# EAGLE board proiect_v14 (EAGLE 9.7.0), part 1 of 2
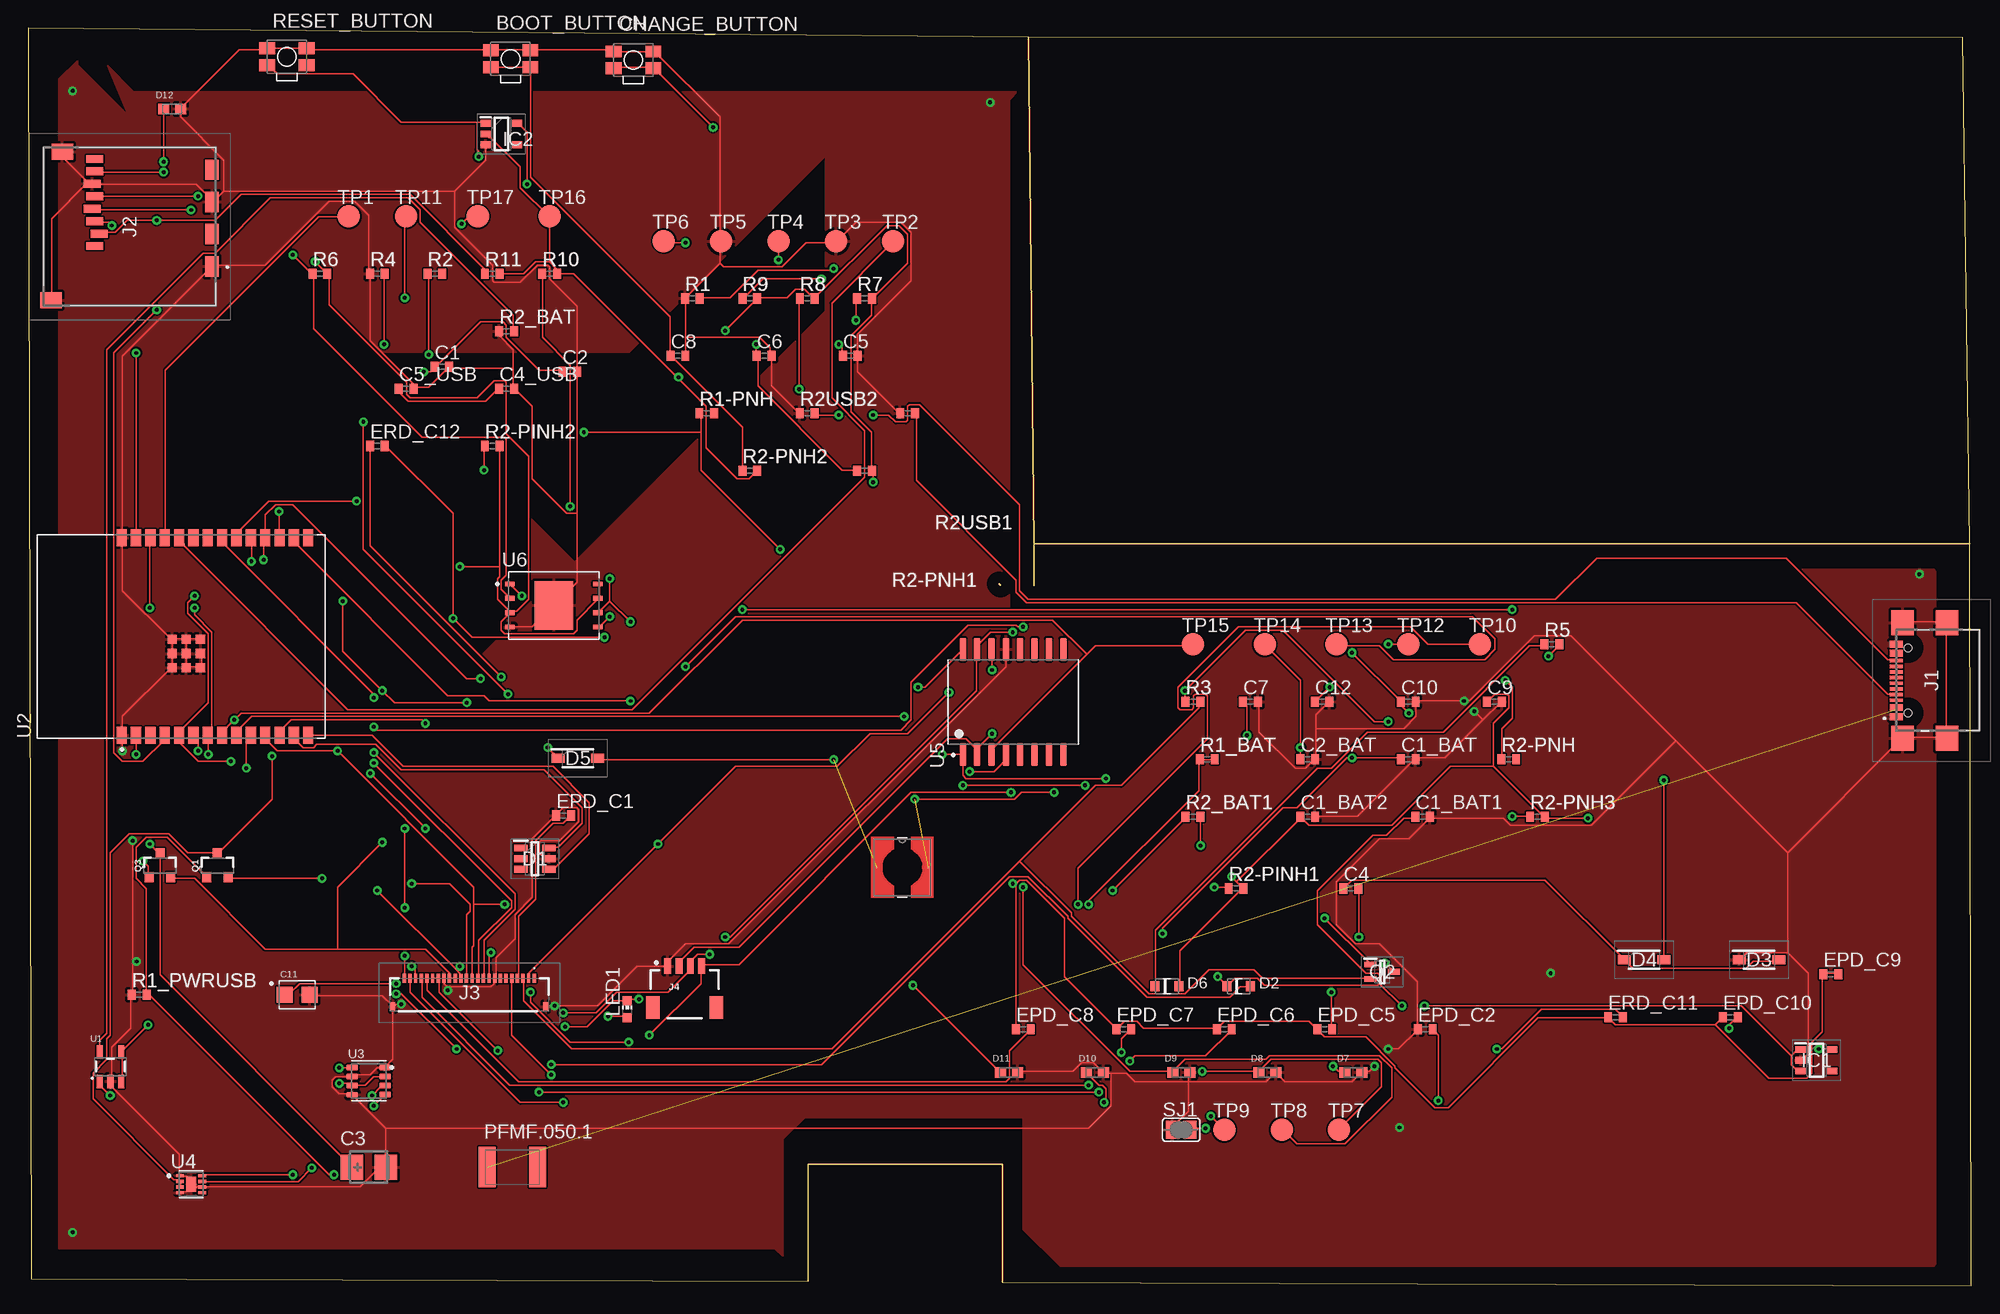
[diagram p0: board, top side]
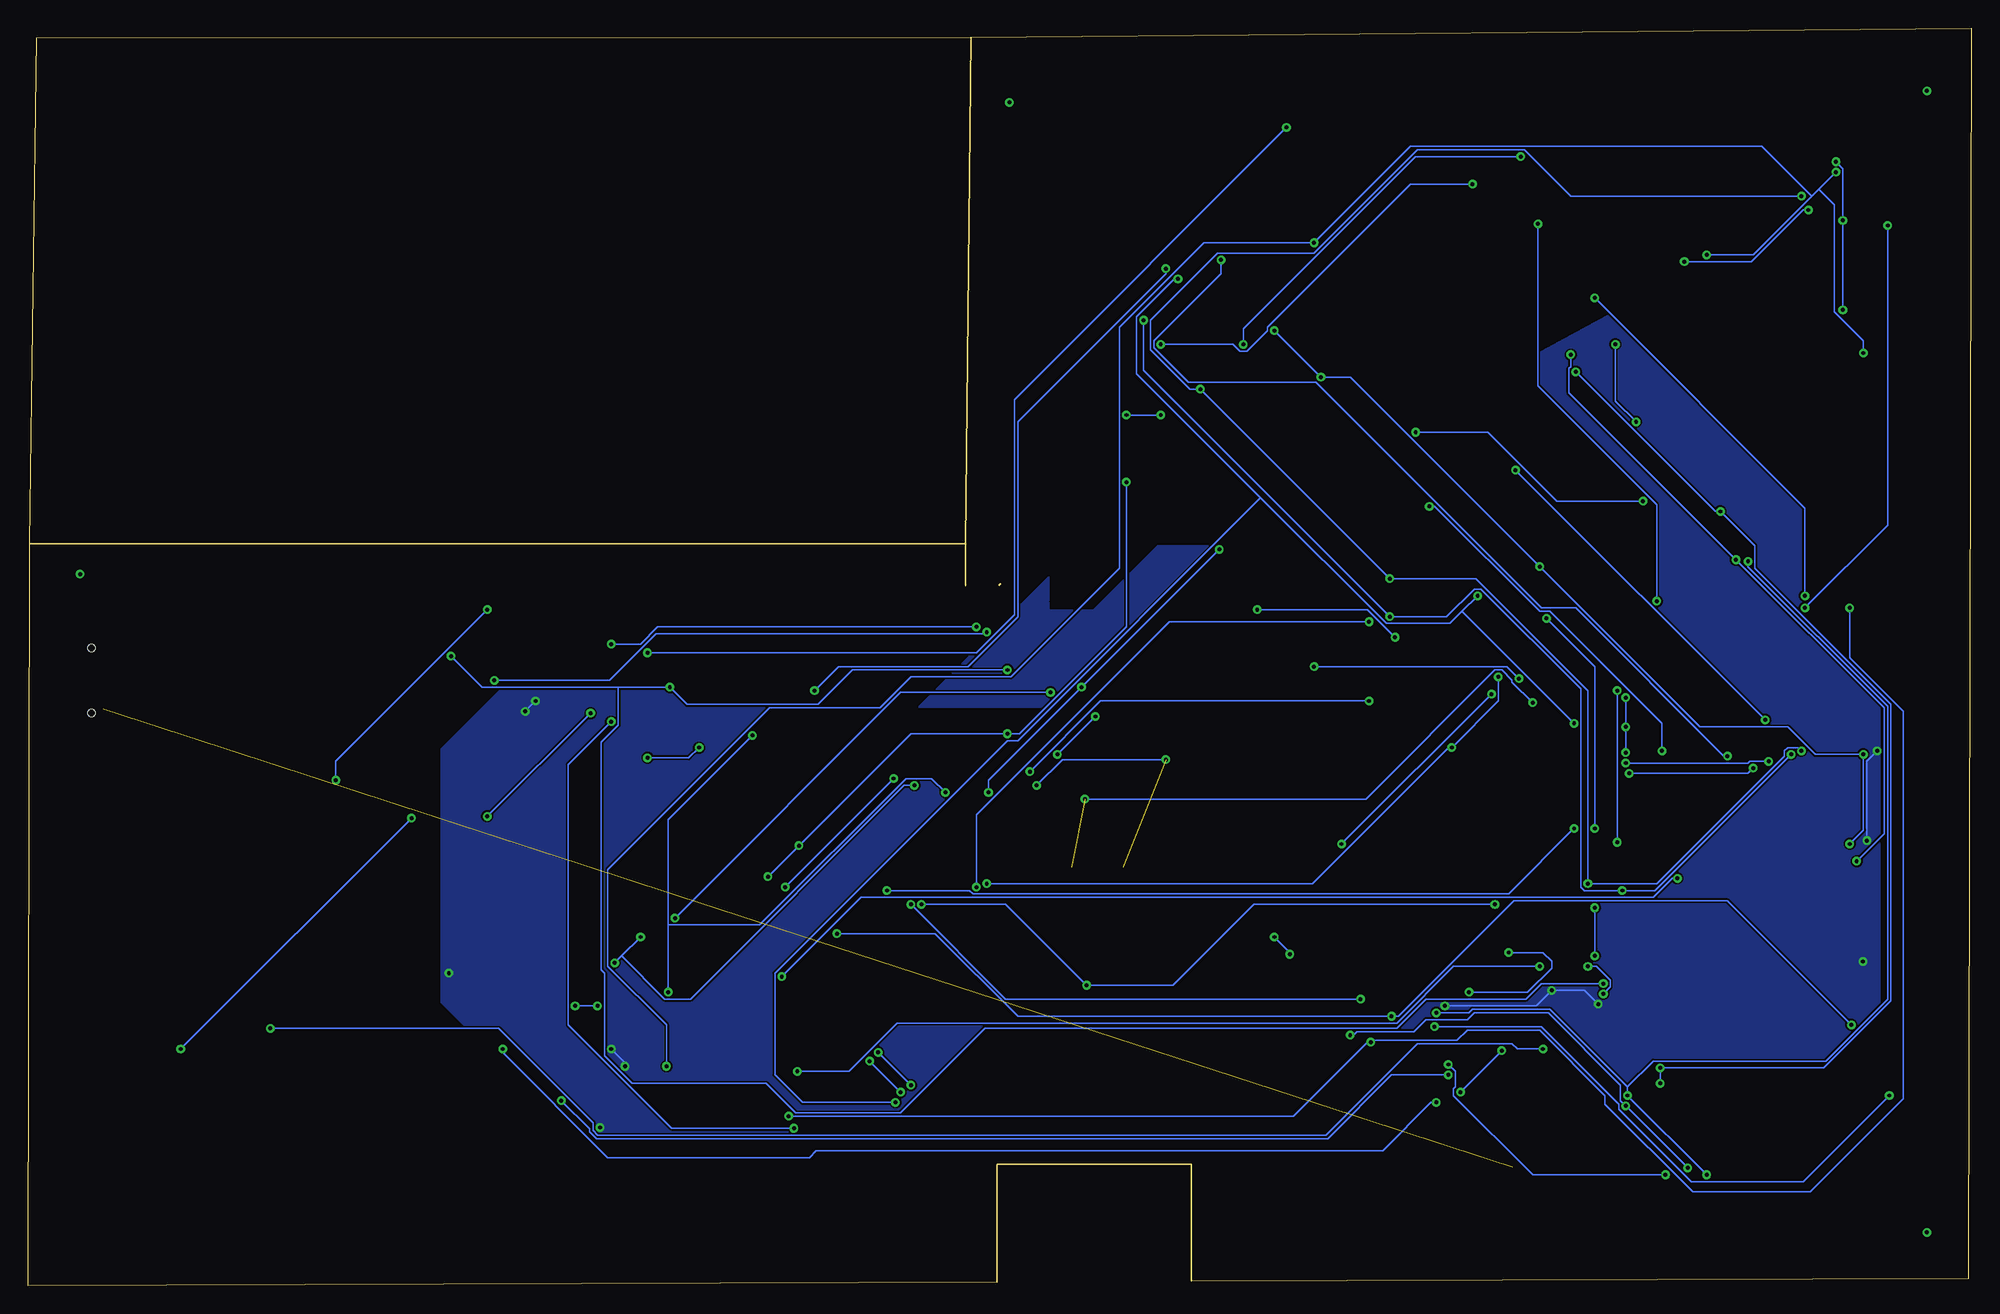
[diagram p1: board, bottom side, seen from below]

Size 171.92 x 111.22 mm. Coordinates in mm from the lower left corner, seen from the top.
Outline: 171.78,65.63 171.92,0 86.21,0.3 86.21,10.73 69,10.73 69,0.36 0.24,0.61 0,111.22 88.49,110.41
Outline: 171.78,65.63 171.17,110.36 88.49,110.41
Outline: 85.92,62.09 86.04,61.96
Outline: 89,61.89 89,65.63
Outline: 89,65.63 88.49,110.41
Outline: 89,65.63 171.78,65.63
Copper layers (1*16): Top 0.035mm / dielectric 1.5mm / Bottom 0.035mm
Design rules "Fusion Electronics Design Rules": minimum track width 6mil, minimum drill 0.35mm, track to track 6mil, track to pad 6mil, pad to pad 6mil, via to via 6mil, smd to smd 6mil, copper to edge 40mil, drill to drill 6mil, minimum pad ring 10mil, minimum via ring 8mil, stop-mask expansion 4mil, vias tented up to drill 9999mil, thermal gap 10mil

## Footprints (pad centres in the part's own frame; a part is rotated, then mirrored left to right if it is on the bottom)
MYBUTTON = smd 1.4 x 1.05: 1 1.75,0.75; 2 -1.75,0.75; 3 -1.75,-0.75; 4 1.75,-0.75
EAGLE-LTSPICE_C0402 = smd 0.7 x 0.9: 1 -0.65,0; 2 0.65,0
RCL_CT3528 = smd 2 x 2.2: + -1.5,0; - 1.5,0
CAPCP3225X100N = smd 1.4 x 1.4: 1 -1.1,0; 2 1.1,0
ESP32_WROVER_EAGLE-LTSPICE_C0402 = smd 0.7 x 0.9: 1 -0.65,0; 2 0.65,0
SOT95P280X145-6N = smd 1.2 x 0.6: 1 -1.25,0.95; 2 -1.25,0; 3 -1.25,-0.95; 4 1.25,-0.95; 5 1.25,0; 6 1.25,0.95
ESP32_WROVER_AVX---SD0805S020S1R0_AVX_SD0805S020S1R0_0 = smd 0.8 x 0.9: 1 -1.05,0; 2 1.05,0
SOD3716X135N = smd 1.15 x 0.8: 1 -1.75,0; 2 1.75,0
DIOC1608X36N = smd 0.97 x 0.94: 1 -0.75,0; 2 0.75,0
SOT95P280X120-5N = smd 0.9 x 0.6: 1 -1.4,0.95; 2 -1.4,0; 3 -1.4,-0.95; 4 1.4,-0.95; 5 1.4,0.95
SOT95P280X125-5N = smd 0.9 x 0.6: 1 -1.4,0.95; 2 -1.4,0; 3 -1.4,-0.95; 4 1.4,-0.95; 5 1.4,0.95
SAMACSYS_PARTS_USB4110GFA = smd 0.3 x 1.15: A1 -3.35,3.678; A4 -2.55,3.678; A5 -1.25,3.678; A6 -0.25,3.678; A7 0.25,3.678; A8 1.25,3.678; A9 2.55,3.678; A12 3.35,3.678; B1 3.05,3.678; B4 2.25,3.678; B5 1.75,3.678; B6 0.75,3.678; B7 -0.75,3.678; B8 -1.75,3.678; B9 -2.25,3.678; B12 -3.05,3.678 | smd 2.18 x 2: MP1 -5.11,-0.827; MP2 5.11,-0.827; MP3 -5.11,3.103; MP4 5.11,3.103 | hole 0.65: -2.89,2.603; 2.89,2.603
112ATAARR03ATTEND = smd 1.8 x 1.2: G1 10.6,10.4; G2 4.9,10.4; S1 7.75,10.4; S2 2.05,10.4 | smd 1.4 x 1.9: G3 13.6,-3.85; G4 0.45,-2.85 | smd 0.7 x 1.5: P1 8.8,0; P2 7.7,0.4; P3 6.6,0; P4 5.5,-0.2; P5 4.4,0; P6 3.3,-0.2; P7 2.2,0; P8 1.1,0
FH34SRJ24S05SH99 = smd 0.3 x 0.8: 1 5.75,1.45; 2 5.25,1.45; 3 4.75,1.45; 4 4.25,1.45; 5 3.75,1.45; 6 3.25,1.45; 7 2.75,1.45; 8 2.25,1.45; 9 1.75,1.45; 10 1.25,1.45; 11 0.75,1.45; 12 0.25,1.45; 13 -0.25,1.45; 14 -0.75,1.45; 15 -1.25,1.45; 16 -1.75,1.45; 17 -2.25,1.45; 18 -2.75,1.45; 19 -3.25,1.45; 20 -3.75,1.45; 21 -4.25,1.45; 22 -4.75,1.45; 23 -5.25,1.45; 24 -5.75,1.45 | smd 0.4 x 0.8: MP1 6.75,-1.05; MP2 -6.75,-1.05
JST04_1MM_RA = smd 0.6 x 1.35: 1 -1.5,0; 2 -0.5,0; 3 0.5,0; 4 1.5,0 | smd 1.2 x 2: NC1 2.8,-3.675; NC2 -2.8,-3.675
IND_4828-WE-TPC_WRE = smd 0.127 x 0.127: 1 -2.286,0; 2 2.286,0
ADAFRUIT_CHIP-LED0603 = smd 0.8 x 0.8: A 0,-0.75; C 0,0.75
ESP32C6_VARISTOR_CT/CN1812 = smd 1.5 x 3.6: 1 -2.25,0; 2 2.25,0
ESP32_WROVER_SPARKFUN-DISCRETESEMI_SOT23-3 = smd 0.8 x 0.9: 1 -0.95,-1; 2 0.95,-1; 3 0,1.1
SOT65P210X110-3N = smd 1.05 x 0.5: 1 -1.05,0.65; 2 -1.05,-0.65; 3 1.05,0
ESP32_WROVER_EAGLE-LTSPICE_R0402 = smd 0.7 x 0.9: 1 -0.65,0; 2 0.65,0
SJ = smd 1.168 x 1.6: 1 -0.762,0; 2 0.762,0
TP20R = smd 2 x 2: TP 0,0
ESP32_WROVER_SPARKFUN-IC-POWER_SOT23-5 = smd 0.55 x 1.2: 1 -0.95,-1.3; 2 0,-1.3; 3 0.95,-1.3; 4 0.95,1.3; 5 -0.95,1.3
XCVR_ESP32-C6-WROOM-1-N8 = smd 1.5 x 0.9: 1 -8.75,5.26; 2 -8.75,3.99; 3 -8.75,2.72; 4 -8.75,1.45; 5 -8.75,0.18; 6 -8.75,-1.09; 7 -8.75,-2.36; 8 -8.75,-3.63; 9 -8.75,-4.9; 10 -8.75,-6.17; 11 -8.75,-7.44; 12 -8.75,-8.71; 13 -8.75,-9.98; 14 -8.75,-11.25; 15 8.75,-11.25; 16 8.75,-9.98; 17 8.75,-8.71; 18 8.75,-7.44; 19 8.75,-6.17; 20 8.75,-4.9; 21 8.75,-3.63; 22 8.75,-2.36; 23 8.75,-1.09; 24 8.75,0.18; 25 8.75,1.45; 26 8.75,2.72; 27 8.75,3.99; 28 8.75,5.26 | smd 0.8 x 0.8: 29_1 -2.755,0.79; 29_2 -1.505,0.79; 29_3 -0.255,0.79; 29_4 -2.755,-0.46; 29_5 -1.505,-0.46; 29_6 -0.255,-0.46; 29_7 -2.755,-1.71; 29_8 -1.505,-1.71; 29_9 -0.255,-1.71
ESP32_WROVER_BME680_PSON80P300X300X100-8N = smd 1.016 x 0.5: 1 1.458,1.2; 2 1.458,0.4; 3 1.458,-0.4; 4 1.458,-1.2; 5 -1.458,-1.22; 6 -1.458,-0.4; 7 -1.458,0.4; 8 -1.458,1.2
SON50P200X200X80-9N = smd 0.76 x 0.27: 1 -0.985,0.75; 2 -0.985,0.25; 3 -0.985,-0.25; 4 -0.985,-0.75; 5 0.985,-0.75; 6 0.985,-0.25; 7 0.985,0.25; 8 0.985,0.75 | smd 0.9 x 1.3: 9 0,0
SOIC127P1032X265-16N = smd 2.05 x 0.59: 1 -4.655,4.445; 2 -4.655,3.175; 3 -4.655,1.905; 4 -4.655,0.635; 5 -4.655,-0.635; 6 -4.655,-1.905; 7 -4.655,-3.175; 8 -4.655,-4.445; 9 4.655,-4.445; 10 4.655,-3.175; 11 4.655,-1.905; 12 4.655,-0.635; 13 4.655,0.635; 14 4.655,1.905; 15 4.655,3.175; 16 4.655,4.445
SON127P600X800X80-9N = smd 0.94 x 0.44: 1 -3.895,1.905; 2 -3.895,0.635; 3 -3.895,-0.635; 4 -3.895,-1.905; 5 3.895,-1.905; 6 3.895,-0.635; 7 3.895,0.635; 8 3.895,1.905 | smd 3.4 x 4.3: 9 0,0

## Placement (x,y rotation side)
BOOT_BUTTON  BUTTON_CUSYOMV1  [MYBUTTON]  42.68,108.52 0 top
C1  100nF  [EAGLE-LTSPICE_C0402]  36.6,81.27 0 top
C1_BAT  4.7uF  [EAGLE-LTSPICE_C0402]  122.11,46.56 0 top
C1_BAT1  4.7uF  [EAGLE-LTSPICE_C0402]  123.38,41.48 0 top
C1_BAT2  4.7uF  [EAGLE-LTSPICE_C0402]  113.22,41.48 0 top
C2  100nF  [EAGLE-LTSPICE_C0402]  47.91,80.84 0 top
C2_BAT  4.7uF  [EAGLE-LTSPICE_C0402]  113.22,46.56 0 top
C3  100 uF TANT  [RCL_CT3528]  30.14,10.48 0 top
C4  4.7uF/25V  [EAGLE-LTSPICE_C0402]  117.03,35.13 0 top
C4_USB  100nF  [EAGLE-LTSPICE_C0402]  42.33,79.35 0 top
C5  100nF  [EAGLE-LTSPICE_C0402]  72.73,82.24 0 top
C5_USB  4.7uF  [EAGLE-LTSPICE_C0402]  33.44,79.35 0 top
C6  100nF  [EAGLE-LTSPICE_C0402]  65.11,82.24 0 top
C7  10uF  [EAGLE-LTSPICE_C0402]  108.14,51.64 0 top
C8  100nF  [EAGLE-LTSPICE_C0402]  57.49,82.24 0 top
C9  100nF  [EAGLE-LTSPICE_C0402]  129.73,51.64 0 top
C10  100nF  [EAGLE-LTSPICE_C0402]  122.11,51.64 0 top
C11  CPH3225A  [CAPCP3225X100N]  23.79,25.72 0 top
C12  100nF  [ESP32_WROVER_EAGLE-LTSPICE_C0402]  114.49,51.64 0 top
CHANGE_BUTTON  BUTTON_CUSYOMV1  [MYBUTTON]  53.55,108.42 0 top
D1  USBLC6-2SC6Y  [SOT95P280X145-6N]  44.83,37.77 0 top
D2  ESP32_WROVER_AVX---SD0805S020S1R0_AVX_SD0805S020S1R0_0_0AVX_SD0805S020S1R0_0_0  [ESP32_WROVER_AVX---SD0805S020S1R0_AVX_SD0805S020S1R0_0]  107.1,26.48 0 top
D3  MBR0530  [SOD3716X135N]  153.14,28.82 0 top
D4  MBR0530  [SOD3716X135N]  142.98,28.82 0 top
D5  MBR0530  [SOD3716X135N]  48.64,46.66 0 top
D6  ESP32_WROVER_AVX---SD0805S020S1R0_AVX_SD0805S020S1R0_0_0AVX_SD0805S020S1R0_0_0  [ESP32_WROVER_AVX---SD0805S020S1R0_AVX_SD0805S020S1R0_0]  100.75,26.48 0 top
D7  PGB1010603MR  [DIOC1608X36N]  117.26,18.86 0 top
D8  PGB1010603MR  [DIOC1608X36N]  109.64,18.86 0 top
D9  PGB1010603MR  [DIOC1608X36N]  102.02,18.86 0 top
D10  PGB1010603MR  [DIOC1608X36N]  94.4,18.86 0 top
D11  PGB1010603MR  [DIOC1608X36N]  86.78,18.86 0 top
D12  PGB1010603MR  [DIOC1608X36N]  12.74,104.08 0 top
EPD_C1  [EAGLE-LTSPICE_C0402]  47.37,41.58 0 top
EPD_C2  [EAGLE-LTSPICE_C0402]  123.61,22.67 0 top
EPD_C5  [EAGLE-LTSPICE_C0402]  114.72,22.67 0 top
EPD_C6  [EAGLE-LTSPICE_C0402]  105.83,22.67 0 top
EPD_C7  [EAGLE-LTSPICE_C0402]  96.94,22.67 0 top
EPD_C8  [EAGLE-LTSPICE_C0402]  88.05,22.67 0 top
EPD_C9  [EAGLE-LTSPICE_C0402]  159.49,27.55 0 top
EPD_C10  [ESP32_WROVER_EAGLE-LTSPICE_C0402]  150.6,23.74 0 top
ERD_C11  [ESP32_WROVER_EAGLE-LTSPICE_C0402]  140.44,23.74 0 top
ERD_C12  1uF  [ESP32_WROVER_EAGLE-LTSPICE_C0402]  30.9,74.27 0 top
IC1  XC6220A331MR-G  [SOT95P280X120-5N]  158.22,19.93 0 top
IC2  BD5229G-TR  [SOT95P280X125-5N]  41.86,101.86 0 top
J1  SAMACSYS_PARTS_USB4110-GF-A  [SAMACSYS_PARTS_USB4110GFA]  168.95,53.53 90 top
J2  112A-TAAR-R03_ATTEND  [112ATAARR03ATTEND]  5.87,100.76 270 top
J3  FH34SRJ-24S-0.5SH_99_  [FH34SRJ24S05SH99]  39.03,25.72 0 top
J4  QWIIC_RIGHT_ANGLE  [JST04_1MM_RA]  58.08,28.26 0 top
L1  68uH  [IND_4828-WE-TPC_WRE]  77.35,36.99 0 top
LED1  [ADAFRUIT_CHIP-LED0603]  53,24.45 0 top
PFMF.050.1  ESP32C6_VARISTORCN1812  [ESP32C6_VARISTOR_CT/CN1812]  42.84,10.48 0 top
Q1  20V/4.2A/52mΩ/1.4W  [ESP32_WROVER_SPARKFUN-DISCRETESEMI_SOT23-3]  16.74,37.13 0 top
Q2  SI1308EDL-T1-GE3  [SOT65P210X110-3N]  119.8,27.75 0 top
Q3  20V/4.2A/52mΩ/1.4W  [ESP32_WROVER_SPARKFUN-DISCRETESEMI_SOT23-3]  11.66,37.13 0 top
R1  2.2  [ESP32_WROVER_EAGLE-LTSPICE_R0402]  58.76,87.32 0 top
R1-PNH  10k  [ESP32_WROVER_EAGLE-LTSPICE_R0402]  60.03,77.16 0 top
R1_BAT  200  [ESP32_WROVER_EAGLE-LTSPICE_R0402]  104.33,46.56 0 top
R1_PWRUSB  100k  [ESP32_WROVER_EAGLE-LTSPICE_R0402]  9.82,25.72 0 top
R2  10k  [ESP32_WROVER_EAGLE-LTSPICE_R0402]  35.98,89.51 0 top
R2-PINH1  100k  [ESP32_WROVER_EAGLE-LTSPICE_R0402]  106.87,35.13 0 top
R2-PINH2  100k  [ESP32_WROVER_EAGLE-LTSPICE_R0402]  41.06,74.27 0 top
R2-PNH  10k  [ESP32_WROVER_EAGLE-LTSPICE_R0402]  131,46.56 0 top
R2-PNH1  10k  [ESP32_WROVER_EAGLE-LTSPICE_R0402]  74,72.08 0 top
R2-PNH2  10k  [ESP32_WROVER_EAGLE-LTSPICE_R0402]  63.84,72.08 0 top
R2-PNH3  10k  [ESP32_WROVER_EAGLE-LTSPICE_R0402]  133.54,41.48 0 top
R2_BAT  2k  [ESP32_WROVER_EAGLE-LTSPICE_R0402]  42.33,84.43 0 top
R2_BAT1  2k  [ESP32_WROVER_EAGLE-LTSPICE_R0402]  103.06,41.48 0 top
R2USB1  5k1  [ESP32_WROVER_EAGLE-LTSPICE_R0402]  77.81,77.16 0 top
R2USB2  5k1  [ESP32_WROVER_EAGLE-LTSPICE_R0402]  68.92,77.16 0 top
R3  0.47  [ESP32_WROVER_EAGLE-LTSPICE_R0402]  103.06,51.64 0 top
R4  10k  [ESP32_WROVER_EAGLE-LTSPICE_R0402]  30.9,89.51 0 top
R5  15  [ESP32_WROVER_EAGLE-LTSPICE_R0402]  134.81,56.72 0 top
R6  10k  [ESP32_WROVER_EAGLE-LTSPICE_R0402]  25.82,89.51 0 top
R7  10k  [ESP32_WROVER_EAGLE-LTSPICE_R0402]  74,87.32 0 top
R8  10k  [ESP32_WROVER_EAGLE-LTSPICE_R0402]  68.92,87.32 0 top
R9  10k  [ESP32_WROVER_EAGLE-LTSPICE_R0402]  63.84,87.32 0 top
R10  10k  [ESP32_WROVER_EAGLE-LTSPICE_R0402]  46.14,89.51 0 top
R11  10k  [ESP32_WROVER_EAGLE-LTSPICE_R0402]  41.06,89.51 0 top
RESET_BUTTON  BUTTON_CUSYOMV1  [MYBUTTON]  22.89,108.7 0 top
SJ1  [SJ]  102.02,13.78 0 top
TP1  TPTP20R  [TP20R]  28.36,94.59 0 top
TP2  TPTP20R  [TP20R]  76.54,92.4 0 top
TP3  TPTP20R  [TP20R]  71.46,92.4 0 top
TP4  TPTP20R  [TP20R]  66.38,92.4 0 top
TP5  TPTP20R  [TP20R]  61.3,92.4 0 top
TP6  TPTP20R  [TP20R]  56.22,92.4 0 top
TP7  TPTP20R  [TP20R]  115.99,13.78 0 top
TP8  TPTP20R  [TP20R]  110.91,13.78 0 top
TP9  TPTP20R  [TP20R]  105.83,13.78 0 top
TP10  TPTP20R  [TP20R]  128.46,56.72 0 top
TP11  TPTP20R  [TP20R]  33.44,94.59 0 top
TP12  TPTP20R  [TP20R]  122.11,56.72 0 top
TP13  TPTP20R  [TP20R]  115.76,56.72 0 top
TP14  TPTP20R  [TP20R]  109.41,56.72 0 top
TP15  TPTP20R  [TP20R]  103.06,56.72 0 top
TP16  TPTP20R  [TP20R]  46.14,94.59 0 top
TP17  TPTP20R  [TP20R]  39.79,94.59 0 top
U1  ESP32_WROVER_SPARKFUN-IC-POWER_MCP73831  [ESP32_WROVER_SPARKFUN-IC-POWER_SOT23-5]  7.28,19.37 0 top
U2  ESP32-C6-WROOM-1-N8  [XCVR_ESP32-C6-WROOM-1-N8]  13.53,57.42 90 top
U3  ESP32_WROVER_BME680_BME680  [ESP32_WROVER_BME680_PSON80P300X300X100-8N]  30.14,18.1 0 top
U4  MAX17048G+T10  [SON50P200X200X80-9N]  14.41,8.96 0 top
U5  DS3231SN#  [SOIC127P1032X265-16N]  87.14,51.62 90 top
U6  W25Q512JVEIQ  [SON127P600X800X80-9N]  46.51,60.16 0 top

## Library data of the parts
BOOT_BUTTON CHANGE_BUTTON LED1 PFMF.050.1 RESET_BUTTON SJ1 TP1-TP17 = DeskAssistant v19 v1
C1 C1_BAT C1_BAT1 C1_BAT2 C2 C2_BAT C4 C4_USB C5 C5_USB C6-C10 C12 EPD_C1 EPD_C2 EPD_C5-EPD_C10 ERD_C11 ERD_C12 = DeskAssistant v19 v1; SPICEMODEL: NONE; SPICEPREFIX: C
C3 = DeskAssistant v19 v1; SPICEPREFIX: C
C11 = DeskAssistant v19 v1; AVAILABILITY: Not in stock; CHECK_PRICES: https://www.snapeda.com/parts/CPH3225A/Seiko+Instruments/view-part/?ref=eda; DESCRIPTION: 11 mF (EDLC) Supercapacitor 3.3 V 1210 (3225 Metric) - -; MF: Seiko Instruments; MP: CPH3225A; PACKAGE: 1210 Seiko; PRICE: None; PURCHASE-URL: https://www.snapeda.com/api/url_track_click_mouser/?unipart_id=562593&manufacturer=Seiko Instruments&part_name=CPH3225A&search_term=None; SNAPEDA_LINK: https://www.snapeda.com/parts/CPH3225A/Seiko+Instruments/view-part/?ref=snap
D1 = DeskAssistant v19 v1; AVAILABILITY: In Stock; CHECK_PRICES: https://www.snapeda.com/parts/USBLC6-2SC6Y/STMicroelectronics/view-part/?ref=eda; DESCRIPTION: 17V Clamp 5A (8/20µs) Ipp Tvs Diode Surface Mount SOT-23-6; MF: STMicroelectronics; MP: USBLC6-2SC6Y; PACKAGE: SOT-23-6 STMicroelectronics; PRICE: None; SNAPEDA_LINK: https://www.snapeda.com/parts/USBLC6-2SC6Y/STMicroelectronics/view-part/?ref=snap
D2 D6 = DeskAssistant v19 v1; CENTROID_NOT_SPECIFIED: No; DATASHEET: http://datasheets.avx.com/schottky.pdf; DIGIKEY_DESCRIPTION: DIODE SCHOTTKY 20V 1A 0805; DIGIKEY_PART_NUMBER: 478-7800-1-ND; LEAD_FREE: yes; MF: AVX; MOUSER_PART_NUMBER: 581-SD0805S020S1R0; PACKAGE: 0805 (2012 metric); PREFIX: D; ROHS: yes; TEMPERATURE_RANGE_HIGH: +125°C; TEMPERATURE_RANGE_LOW: -55°C
D3-D5 = DeskAssistant v19 v1; AVAILABILITY: In Stock; CHECK_PRICES: https://www.snapeda.com/parts/MBR0530/Onsemi/view-part/?ref=eda; DESCRIPTION: Diode Schottky 30 V 500mA Surface Mount SOD-123; MF: ON Semiconductor; MP: MBR0530; PACKAGE: SOD-123-2 ON Semiconductor; PRICE: None; PURCHASE-URL: https://www.snapeda.com/api/url_track_click_mouser/?unipart_id=179458&manufacturer=ON Semiconductor&part_name=MBR0530&search_term=None; SNAPEDA_LINK: https://www.snapeda.com/parts/MBR0530/Onsemi/view-part/?ref=snap
D7-D12 = DeskAssistant v19 v1; AVAILABILITY: In Stock; CHECK_PRICES: https://www.snapeda.com/parts/PGB1010603MR/Littelfuse/view-part/?ref=eda; DESCRIPTION: 150V (Typ) Clamp - Ipp Tvs Diode Surface Mount 0603 (1608 Metric); MF: Littelfuse Inc.; MP: PGB1010603MR; PACKAGE: 0603 Littelfuse Inc.; PRICE: None; PURCHASE-URL: https://www.snapeda.com/api/url_track_click_mouser/?unipart_id=5659453&manufacturer=Littelfuse Inc.&part_name=PGB1010603MR&search_term=None; SNAPEDA_LINK: https://www.snapeda.com/parts/PGB1010603MR/Littelfuse/view-part/?ref=snap
IC1 = DeskAssistant v19 v1; DESCRIPTION: LDO Voltage Regulators; HEIGHT: 1.2mm; MANUFACTURER_NAME: Torex; MANUFACTURER_PART_NUMBER: XC6220A331MR-G; MOUSER_PART_NUMBER: 865-XC6220A331MR-G; MOUSER_PRICE-STOCK: https://www.mouser.co.uk/ProductDetail/Torex-Semiconductor/XC6220A331MR-G?qs=AsjdqWjXhJ8ZSWznL1J0gg%3D%3D
IC2 = DeskAssistant v19 v1; DESCRIPTION: Voltage Detector with Adjustable Delay Time: CMOS processes are utilized to develop high precision, low current consumption CMOS reset ICs that allow arbitrary setting of the delay time. The extensive lineup includes both Nch Open Drain and CMOS output types in a wide range of detection voltages (from 2.3V to 6.0V, in 0.1V steps), enabling selection of the ideal solution based on customer requirements. In addition, the entire series is of course both lead-free and RoHS-compliant.; HEIGHT: 1.25mm; MANUFACTURER_NAME: ROHM Semiconductor; MANUFACTURER_PART_NUMBER: BD5229G-TR; MOUSER_PART_NUMBER: 755-BD5229G-TR; MOUSER_PRICE-STOCK: https://www.mouser.co.uk/ProductDetail/ROHM-Semiconductor/BD5229G-TR?qs=4kLU8WoGk0vvnhrrYwdszw%3D%3D
J1 = DeskAssistant v19 v1; DESCRIPTION: CONN USB 2.0 TYPE-C R/A SMT; HEIGHT: 3.26mm; MANUFACTURER_NAME: GCT (GLOBAL CONNECTOR TECHNOLOGY); MANUFACTURER_PART_NUMBER: USB4110-GF-A; MOUSER_PART_NUMBER: 640-USB4110-GF-A; MOUSER_PRICE-STOCK: https://www.mouser.co.uk/ProductDetail/GCT/USB4110-GF-A?qs=KUoIvG%2F9IlYiZvIXQjyJeA%3D%3D
J2 = DeskAssistant v19 v1; DESCRIPTION: Micro SD Card Socket, Push-Push Type, Top Mount, SMT, H=1.83mm, 10u; HEIGHT: 1.9mm; MANUFACTURER_NAME: ATTEND; MANUFACTURER_PART_NUMBER: 112A-TAAR-R03 ATTEND
J3 = DeskAssistant v19 v1; DESCRIPTION: 24 Position FFC, FPC Connector Contacts, Top and Bottom 0.020" (0.50mm) Surface Mount, Right Angle; HEIGHT: 1.1mm; MANUFACTURER_NAME: Hirose; MANUFACTURER_PART_NUMBER: FH34SRJ-24S-0.5SH(99); MOUSER_PART_NUMBER: 798-FH34SRJ24S05SH99; MOUSER_PRICE-STOCK: https://www.mouser.co.uk/ProductDetail/Hirose-Connector/FH34SRJ-24S-0.5SH99?qs=vcbW%252B4%252BSTIpKBl5ap9J8Fw%3D%3D
J4 = DeskAssistant v19 v1; PROD_ID: CONN-13694
L1 = DeskAssistant v19 v1; COPYRIGHT: Copyright (C) 2024 Ultra Librarian. All rights reserved.; MANUFACTURER_PART_NUMBER: 744043680; MFR_NAME: Wurth Electronics
Q1 Q3 = DeskAssistant v19 v1; PROD_ID: TRAN-14388
Q2 = DeskAssistant v19 v1; AVAILABILITY: In Stock; CHECK_PRICES: https://www.snapeda.com/parts/SI1308EDL-T1-GE3/Vishay+Siliconix/view-part/?ref=eda; DESCRIPTION: Si1308EDL-T1-GE3 N-channel MOSFET Transistor, 1.5 A, 30 V, 3-Pin SC-70 | Siliconix / Vishay SI1308EDL-T1-GE3; MF: Vishay Siliconix; MP: SI1308EDL-T1-GE3; PACKAGE: SOT-323 Vishay Semiconductor; PRICE: None; PURCHASE-URL: https://www.snapeda.com/api/url_track_click_mouser/?unipart_id=274603&manufacturer=Vishay Siliconix&part_name=SI1308EDL-T1-GE3&search_term=None; SNAPEDA_LINK: https://www.snapeda.com/parts/SI1308EDL-T1-GE3/Vishay+Siliconix/view-part/?ref=snap
R1 R1-PNH R1_BAT R1_PWRUSB R2 R2-PINH1 R2-PINH2 R2-PNH R2-PNH1-R2-PNH3 R2_BAT R2_BAT1 R2USB1 R2USB2 R3-R11 = DeskAssistant v19 v1; SPICEMODEL: NONE; SPICEPREFIX: R
U1 = DeskAssistant v19 v1; PROD_ID: IC-09995
U2 = DeskAssistant v19 v1; AVAILABILITY: In Stock; CHECK_PRICES: https://www.snapeda.com/parts/ESP32-C6-WROOM-1-N8/Espressif+Systems/view-part/?ref=eda; DESCRIPTION: Multiprotocol Modules ESP32-C6 module, Wi-Fi 6 in 2.4 GHz band, Bluetooth 5, Zigbee 3.0 and Thread. ESP34-WROOM Compatible - ENGINEERING SAMPLE; MF: Espressif Systems; MP: ESP32-C6-WROOM-1-N8; PACKAGE: None; PRICE: None; SNAPEDA_LINK: https://www.snapeda.com/parts/ESP32-C6-WROOM-1-N8/Espressif+Systems/view-part/?ref=snap
U3 = DeskAssistant v19 v1; AVAILABILITY: Unavailable; DESCRIPTION: Integrated Environmental Unit; MF: Bosch Sensortec; MP: BME680; PACKAGE: LGA-8 Bosch Tools; PRICE: None
U4 = DeskAssistant v19 v1; AVAILABILITY: In Stock; CHECK_PRICES: https://www.snapeda.com/parts/MAX17048G+T10/Analog+Devices/view-part/?ref=eda; DESCRIPTION: 3µA 1-Cell/2-Cell Fuel Gauge with ModelGauge; MF: Analog Devices; MP: MAX17048G+T10; PACKAGE: TDFN-8 Maxim; PRICE: None; PURCHASE-URL: https://www.snapeda.com/api/url_track_click_mouser/?unipart_id=329239&manufacturer=Analog Devices&part_name=MAX17048G+T10&search_term=None; SNAPEDA_LINK: https://www.snapeda.com/parts/MAX17048G+T10/Analog+Devices/view-part/?ref=snap
U5 = DeskAssistant v19 v1; AVAILABILITY: In Stock; CHECK_PRICES: https://www.snapeda.com/parts/DS3231SN%23/Analog+Devices/view-part/?ref=eda; DESCRIPTION: Extremely Accurate I²C-Integrated RTC/TCXO/Crystal; MF: Analog Devices; MP: DS3231SN#; PACKAGE: SOIC-16 Maxim; PRICE: None; PURCHASE-URL: https://www.snapeda.com/api/url_track_click_mouser/?unipart_id=99048&manufacturer=Analog Devices&part_name=DS3231SN#&search_term=None; SNAPEDA_LINK: https://www.snapeda.com/parts/DS3231SN%23/Analog+Devices/view-part/?ref=snap
U6 = DeskAssistant v19 v1; AVAILABILITY: In Stock; CHECK_PRICES: https://www.snapeda.com/parts/W25Q512JVEIQ/Winbond+Electronics/view-part/?ref=eda; DESCRIPTION: FLASH - NOR Memory IC 512Mb (64M x 8) SPI - Quad I/O 133 MHz 8-WSON (8x6); MF: Winbond Electronics; MP: W25Q512JVEIQ; PACKAGE: Package; PRICE: None; SNAPEDA_LINK: https://www.snapeda.com/parts/W25Q512JVEIQ/Winbond+Electronics/view-part/?ref=snap

## Nets
3V3: C1_BAT2.1 C3.+ C9.1 D6.2 IC1.5 IC2.2 J2.P4 J4.2 Q3.3 R2-PINH1.2 R2-PINH2.2 R2-PNH1.2 R2-PNH2.2 R2-PNH3.2 R2_BAT1.2 R6.2 R7.2 R8.2 R9.2 R10.2 R11.2 TP16.TP U2.2 U5.2 U6.3 U6.7 U6.8
12C_PW: C1.1 C2.1 U2.17 U3.2 U3.6 U3.8
12C_PW1: C5.1 IC2.5
12C_PW3: BOOT_BUTTON.3 BOOT_BUTTON.4 C8.1 R2-PNH2.1
32KHZ: R2-PINH1.1 U2.9 U5.1
DN: J1.A7 J1.B6
DP: J1.A6 J1.B7
EPD_3V3: C7.1 EPD_C5.2 J3.15 J3.16 L1.2 Q3.2 TP17.TP
EPD_3V3_C: Q3.1 R2.1 TP13.TP U2.18
EPD_BUSY: J3.9 TP9.TP U2.26
EPD_CS: D11.1 J3.12 R10.1 TP10.TP U2.11
EPD_DC: J3.11 TP11.TP U2.5
EPD_RST: J3.10 TP12.TP U2.21
FLASH_CS: D10.1 R9.1 U2.12 U6.1
GDR: J3.2 Q2.1 R4.2
GND: BOOT_BUTTON.1 BOOT_BUTTON.2 C1.2 C1_BAT1.2 C1_BAT2.2 C1_BAT.2 C2.2 C2_BAT.2 C3.- C4_USB.2 C5.2 C5_USB.2 C6.2 C7.2 C8.2 C9.2 C10.2 C11.2 C12.2 CHANGE_BUTTON.1 CHANGE_BUTTON.2 D1.5 D3.1 D7.2 D8.2 D9.2 D10.2 D11.2 D12.2 EPD_C1.1 EPD_C2.1 IC1.2 IC2.3 J1.A1 J1.A12 J1.B1 J1.B12 J1.MP1 J1.MP2 J1.MP3 J1.MP4 J2.G1 J2.G2 J2.G3 J2.G4 J2.P6 J3.8 J3.17 J3.MP1 J3.MP2 J4.1 R1.1 R1_PWRUSB.1 R2_BAT.1 R2USB1.1 R2USB2.1 R4.1 RESET_BUTTON.1 RESET_BUTTON.2 SJ1.1 TP3.TP TP5.TP U1.2 U2.1 U2.28 U2.29_1 U2.29_2 U2.29_3 U2.29_4 U2.29_5 U2.29_6 U2.29_7 U2.29_8 U2.29_9 U3.1 U3.5 U3.7 U4.1 U4.4 U4.6 U4.9 U5.13 U6.4 U6.9
GPIO8: R2_BAT1.1 U2.10
INT_RTC: R2-PINH2.1 TP15.TP U2.8 U5.3
IO/BOOT: U2.15
IO_CHANGE: U2.23
MISO: D7.1 J2.P7 R6.1 TP6.TP U2.27 U6.2
MOSI: D8.1 J2.P3 J3.14 R7.1 TP7.TP U2.7 U6.5
N$1: PFMF.050.1.2
N$2: J1.A5 R2USB1.2
N$3: J1.B4
N$4: J1.A9
N$5: J1.B5 R2USB2.2
N$6: J1.B9
N$7: D1.1
N$8: D1.2
N$9: D1.3
N$10: C4_USB.1 C5_USB.1
N$11: C1_BAT1.1 D2.1 IC1.1 IC1.3 Q1.2
N$12: D2.2 Q1.1 R1_PWRUSB.2
N$13: R2_BAT.2 U1.5
N$14: C4.1 D3.2 D4.1
N$15: EPD_C1.2 J3.4
N$16: EPD_C2.2 J3.5
N$17: C6.1 IC2.1 R2-PNH1.1 RESET_BUTTON.3
N$18: C10.1 CHANGE_BUTTON.3 CHANGE_BUTTON.4 R2-PNH3.1
N$21: D6.1 R5.1
N$24: EPD_C8.2 J3.20
N$25: EPD_C7.2 J3.21
N$26: EPD_C6.2 J3.18 J3.19
N$27: EPD_C10.2 J3.22
N$28: ERD_C11.2 J3.23
PREVGH: D5.1 EPD_C5.1 EPD_C6.1 EPD_C7.1 EPD_C8.1 EPD_C9.1 EPD_C9.2 EPD_C10.1 ERD_C11.1 ERD_C12.1
PREVGL: D4.2 ERD_C12.2 J3.24
RESE: J3.3 Q2.2 R3.2
RESE': R1.2 R3.1 SJ1.2
RESE'1: LED1.C R1_BAT.1 R1_BAT.2 U1.1
RESET: U2.3
RTC_RST: U2.16 U5.4
RX: TP2.TP U2.24
SCK: D9.1 J2.P5 J3.13 R8.1 TP8.TP U2.6 U6.6
SCL: J4.4 R1-PNH.1 U2.20 U3.4 U4.7 U5.16
SDA: J4.3 R2-PNH.1 U2.19 U3.3 U4.8 U5.15
SRC: C4.2 D5.2 L1.1 Q2.3
SS_SD: D12.1 J2.P2 R11.1 U2.4
TX: TP1.TP U2.25
USB_D+: D1.4 U2.14
USB_D-: D1.6 U2.13
VBAT: Q1.3 TP4.TP U4.2 U4.3
VBUS: C1_BAT.1 C2_BAT.1 LED1.A TP14.TP U1.3 U1.4
VRTC: C11.1 C12.1 R5.2 U5.14
VUSB: J1.A4 PFMF.050.1.1